# Altium PCB ProjetM1S1.PCBDOC
Units mm, origin at the board's own origin, x right, y up, seen from the top; angles counter-clockwise.
Board outline 299.72 x 199.9 mm, 2 copper layers (Top Layer, Bottom Layer); 7 components, 17 nets, 59 pads, 9 vias.
Unrouted connection lines stored in the file: 1.
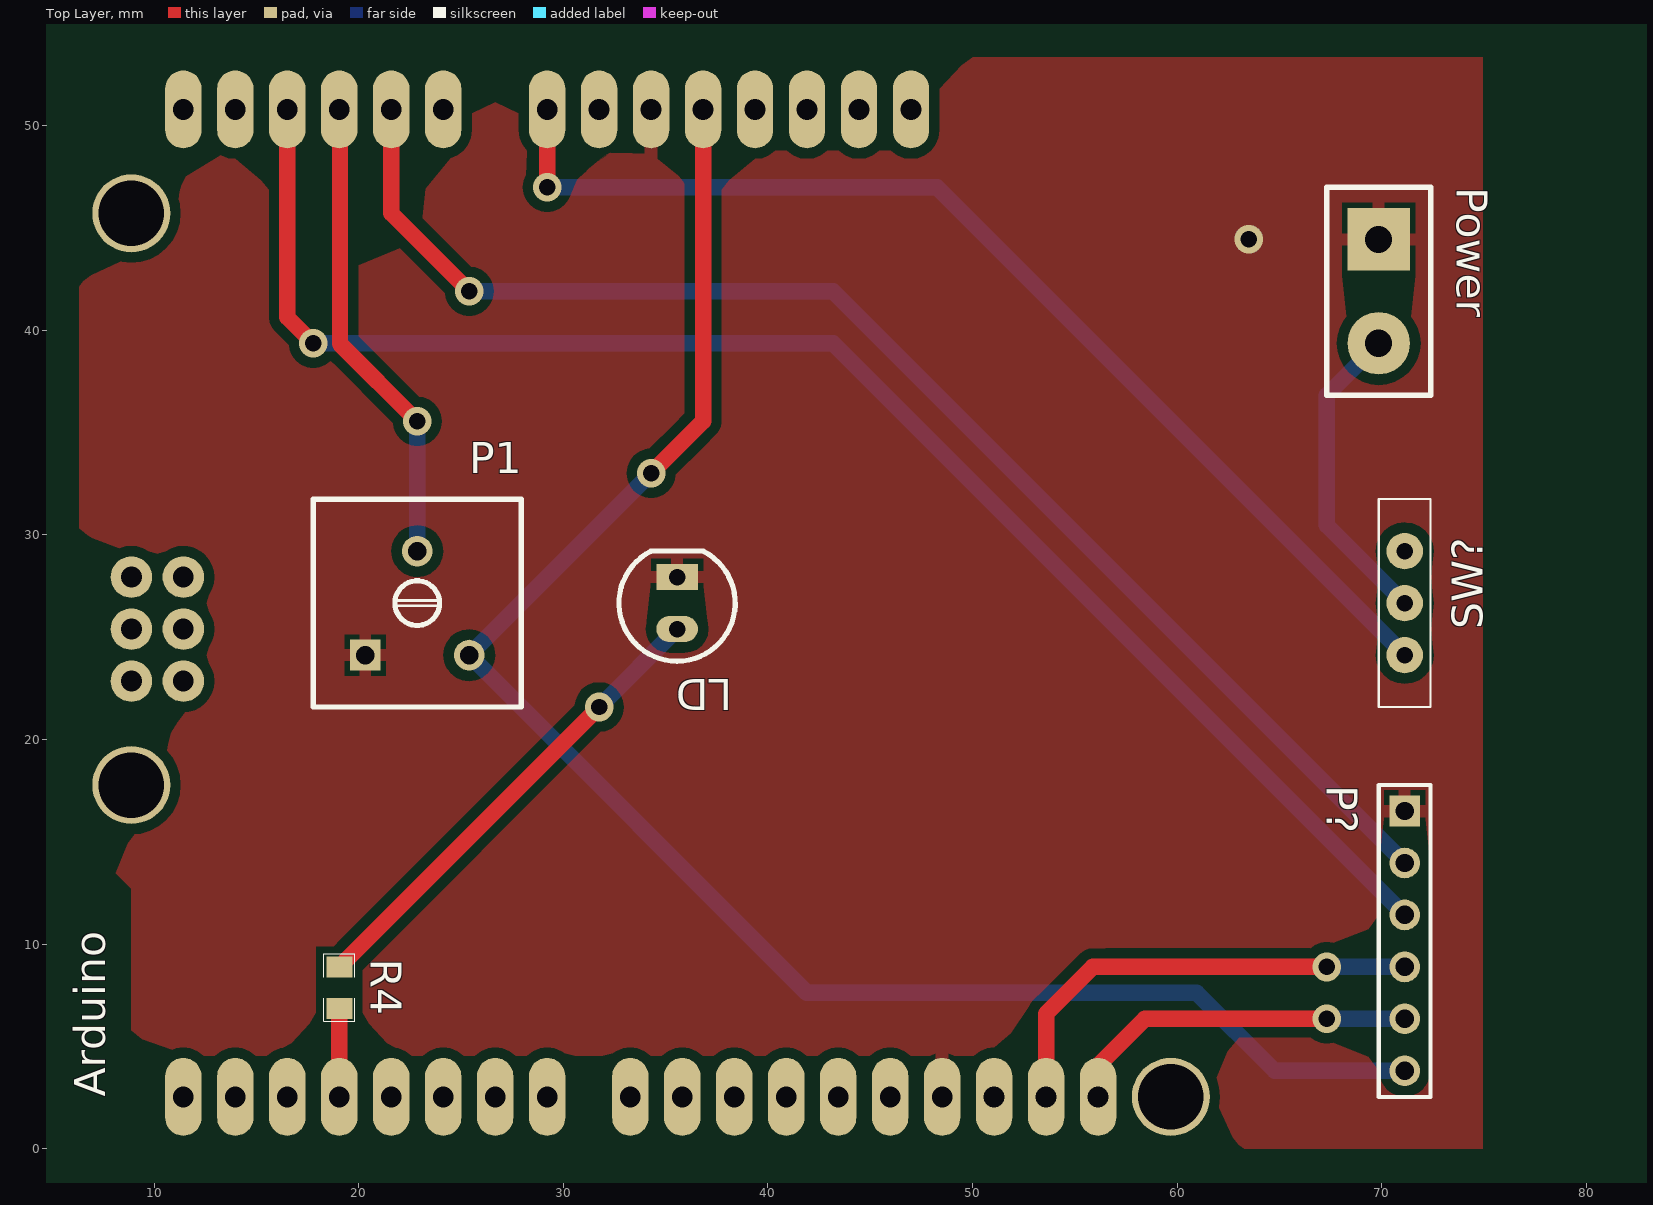
[diagram p0: Top Layer view]
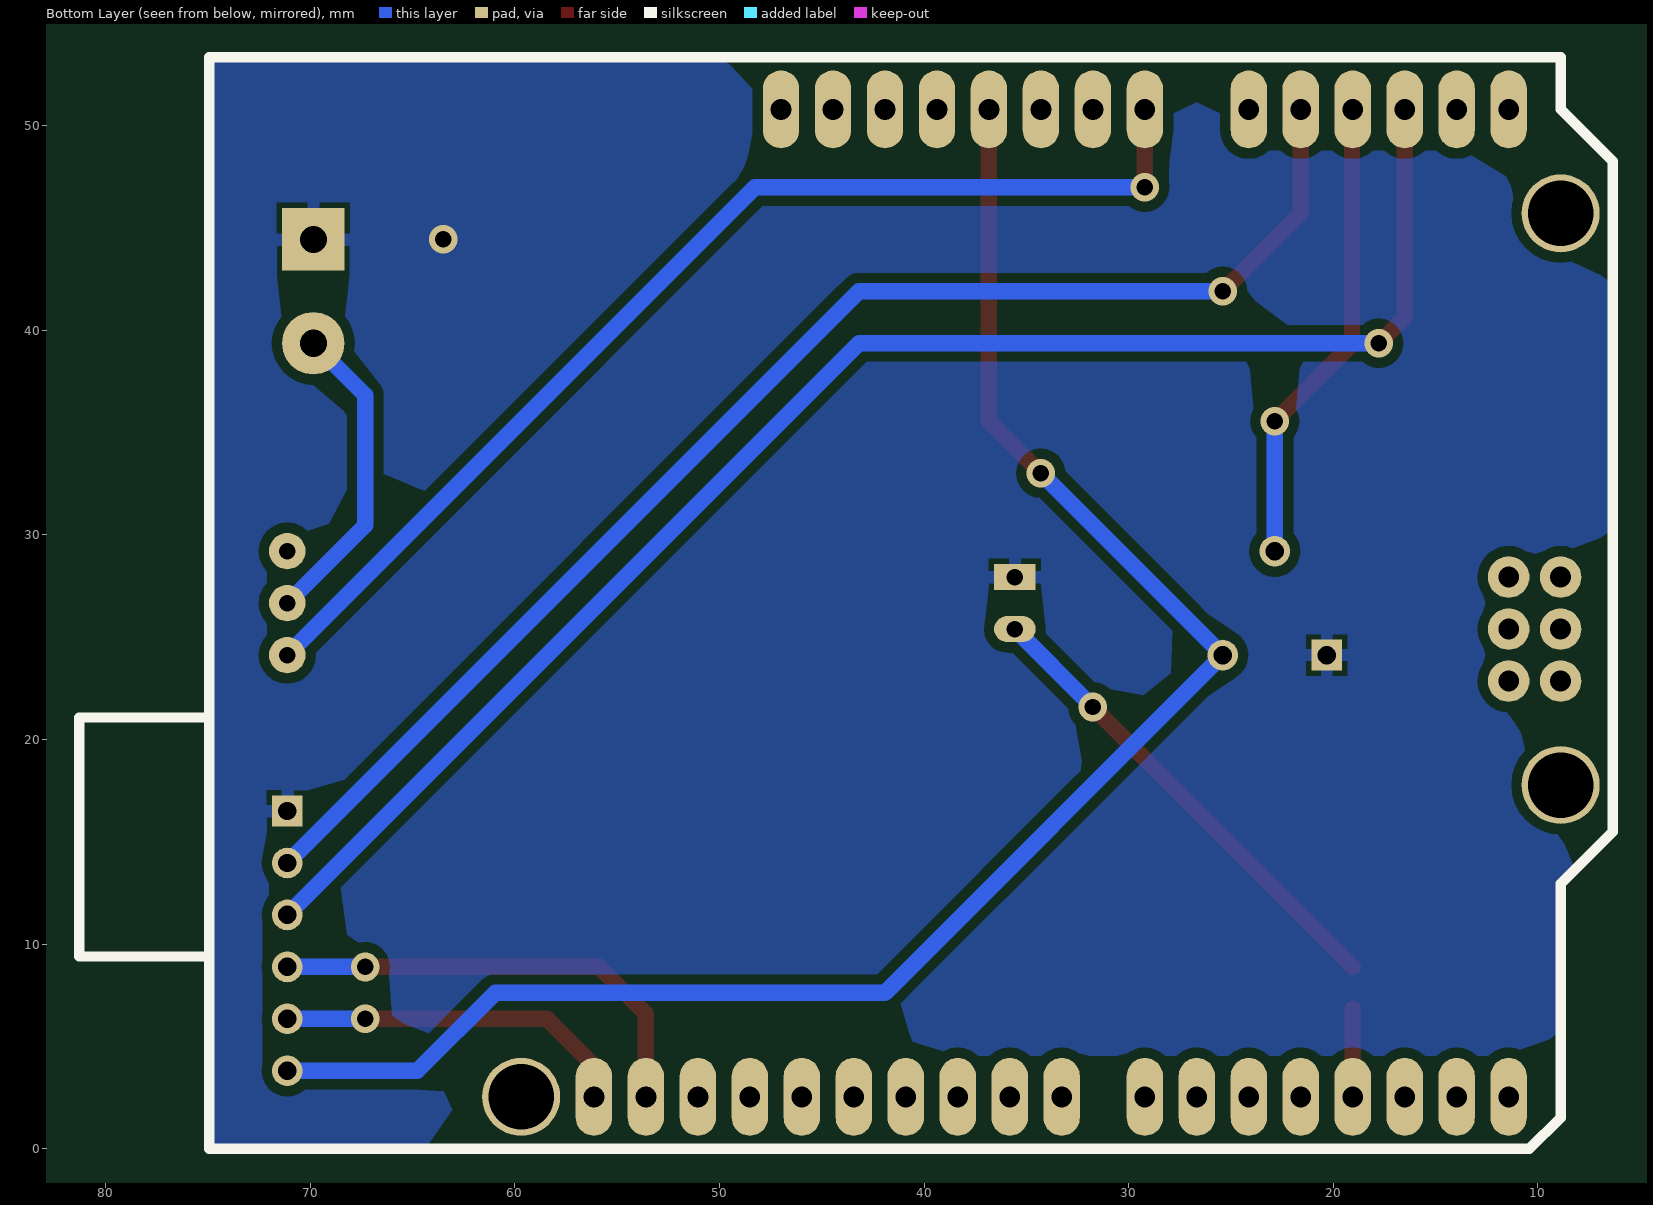
[diagram p1: Bottom Layer view, seen from below]

## Layer stack, top to bottom
Top Solder: solder mask 0.0102, Solder Resist, Dk 3.5
Top Layer: signal copper 0.0356
Dielectric1: dielectric 0.32, FR-4, Dk 4.8
Bottom Layer: signal copper 0.0356
Bottom Solder: solder mask 0.0102, Solder Resist, Dk 3.5

## Board outline
-141.655,-46.39 158.065,-46.39 158.065,153.508 -141.655,153.508

## Design rules (kind name [scope] priority, off if disabled: settings)
Clearance Clearance_bottom_polygon [OnLayer('Bottom Layer') Or OnLayer('Multi-Layer') vs OnLayer('Bottom Layer')  And  InPoly] p1: gap=0.508
Clearance Clearance_top_polygon [OnLayer('Top Layer')  Or OnLayer('Multi-Layer') vs OnLayer('Top Layer') And InPoly] p2: gap=0.508
Clearance Clearance_bottom [OnLayer('Bottom Layer') Or OnLayer('Multi-Layer') vs OnLayer('Bottom Layer')  And Not InPoly] p3: gap=0.203
Clearance Clearance_top [OnLayer('Top Layer')  Or OnLayer('Multi-Layer') vs OnLayer('Top Layer') And Not InPoly] p4: gap=0.203
Clearance Clearance_pad_to_pad [OnLayer('Multi-Layer') vs OnLayer('Multi-Layer')] p5: gap=0.254
ComponentClearance ComponentClearance_bottom [OnLayer('Bottom Overlay') vs OnLayer('Bottom Overlay')] p1: gap=0 collisioncheckmode=3 verticalgap=0.254 showdistances=FALSE
ComponentClearance ComponentClearance_top [OnLayer('Top Overlay') vs OnLayer('Top Overlay')] p2: gap=0 collisioncheckmode=3 verticalgap=0.254 showdistances=FALSE
FabricationTestPointUsage TestPointUsage [All] p1: valid=0 allowmultiple=FALSE
FabricationTestpoint Testpoint [All] p1: side=3 testpointundercomponent=TRUE minsize=1.016 maxsize=2.54 preferedsize=1.524 minholesize=0 maxholesize=1.016 preferedholesize=0.813 testpointgrid=0.025 allowsidetop=TRUE allowsidebottom=TRUE usegrid=TRUE gridtolerance=0
HoleSize [All] p1: absolutevalues=TRUE maxlimit=25.4 minlimit=0.406 maxpercent=80.000 minpercent=20.000
MinimumAnnularRing [PadXSize_AllLayers = PadYSize_AllLayers] p1: minimumring=0.254
PermittedLayers [All] p1: toplayerpermitted=TRUE bottomlayerpermitted=TRUE
PolygonConnect [All] p1: connectstyle=Relief reliefconductorwidth=0.61 reliefentries=4 polygonreliefangle="90 Angle" airgapwidth=0.254
RoutingVias [All] p1: holewidth=0.406 width=0.914 viastyle="Through Hole" minholewidth=0.406 minwidth=0.914 maxholewidth=25.4 maxwidth=25.4
SMDNeckDown [All] p1: percent=95.000
SMDToPlane [All] p1: distance=0
SolderMaskExpansion [All] p1: expansion=0.102
ViasUnderSMD [All] p1: allowed=FALSE
Width [All] p1: maxlimit=1 minlimit=0.254 preferedwidth=0.8 minimp=50.000000 maximp=50.000000 favimp=50.000000
Width Width_botom_top [OnLayer('Bottom Layer') or OnLayer('Top Layer')] p2: maxlimit=254 minlimit=0.254 preferedwidth=0.813
26 further rules are at their usual default settings.

## Components (designator, comment, footprint, x,y, rotation, side; value= is the part's Value field where it differs from the comment)
Arduino "ARDUINO_UNO" ARDUINO_UNO 74.93,53.34 r180 top
LD "" LED5 35.56,27.94 r180 top
P1 "POT_SINGLE" BOURNS3310Y 20.32,24.13 r90 top
P? "Header 6" HDR1X6 71.12,3.81 r90 top
Power "" POWER2 69.85,44.45 r270 top
R4 "RES" 0805 19.05,8.89 r270 top
SW? "SW_SPDT" 1K2_V 71.12,26.67 r180 top

## Footprints (in the part's own frame and the unit in brackets; to place one, negate y for a bottom-side part, rotate by r counter-clockwise, add the part's x,y. Pads: shape width x height; smd on the part's side, far side on the other; paste and mask are expansions set on the pad)
1K2_V [mil]
  round 70 hole 32: 1(0,0) 2(0,100) 3(0,-100)
  silkscreen extent -50,-200 50,200
0805 [mil]
  rect 40x50 smd: 1(0,0) 2(80,0)
  silkscreen extent -25,-30 105,30
ARDUINO_UNO [mil]
  oval 70x150 hole 40: 0(1200,100) 1(1300,100) 2(1400,100) 3(1500,100) 4(1600,100) 5(1700,100) 6(1800,100) 7(2000,100) 8(2100,100) 9(2200,100) 10(2300,100) 11(2400,100) 12(2500,100) 13(2500,2000) 14(2400,2000) 15(2300,2000) 16(2200,2000) 17(2100,2000) 18(2000,2000) 19(1900,2000) 20(1800,2000) 21(1640,2000) 22(1540,2000) 23(1440,2000) 24(1340,2000) 25(1240,2000) 26(1140,2000) 27(1040,2000) 28(940,2000) 29(840,2000) 30(740,2000) 100(1100,100)
  round 80 hole 40: 31(2500,1200) 32(2600,1200) 33(2500,1100) 34(2600,1100) 35(2500,1000) 36(2600,1000)
  round 150 hole 126: ""(600,2000) ""(2600,300) ""(2600,1400)
BOURNS3310Y [mm]
  rect 1.5x1.5 hole 0.9: 1(0,0)
  round 1.5 hole 0.9: 2(5.08,-2.54) 3(0,-5.08)
  silkscreen extent -2.54,-7.62 7.62,2.54
HDR1X6 [mm] "Connector; Header; 6 Position"
  round 1.5 hole 0.9: 1(0,0) 2(2.54,0) 3(5.08,0) 4(7.62,0) 5(10.16,0)
  rect 1.5x1.5 hole 0.9: 6(12.7,0)
  silkscreen extent -1.27,-1.27 13.97,1.27
LED5 [mil] "5mm LED"
  oval 80x50 hole 32 unplated: A(0,100)
  rect 80x50 hole 32 unplated: K(0,0)
  silkscreen extent -112,-50 112,162
POWER2 [mil]
  rect 120x120 hole 52: 1(0,0)
  round 120 hole 52: 2(200,0)
  silkscreen extent -100,-100 300,100

## Part data
LD: library part LED, "LED 5mm/3mm/CMS"
P1: "potentiomètre simple"
P?: "Header, 6-Pin"
Power: library part POWER2, "connecteur alim 2 pôles"
R4: "resistance"

## Via types
v1: diameter 1.4, hole 0.8, Top Layer to Bottom Layer, 9 vias

## Nets (pads, with @x,y where several pads share a name; then routed paths per layer and width w, separated by ;. In a path a pad name is that pad's centre, name@x,y a point inside that pad or via, vN(x,y) a via of type N, cw(c..) or ccw(c..) an arc to the next point about the centre after c; other vN are vias at no path point)
A1: Arduino.8 P?.5 | length 67.8
  Top Layer w0.8: Arduino.8 21.59,45.72 v1(25.4,41.91)
  Bottom Layer w0.8: v1(25.4,41.91) 26.67,41.91 43.18,41.91 P?.5
A2: Arduino.9 P1.2 | length 23.2
  Top Layer w0.8: Arduino.9 19.083,50.767 19.083,39.337 v1(22.86,35.56)
  Bottom Layer w0.8: P1.2 v1(22.86,35.56)
A3: Arduino.10 P?.4 | length 76.9
  Top Layer w0.8: Arduino.10 16.51,40.64 v1(17.78,39.37)
  Bottom Layer w0.8: v1(17.78,39.37) 43.18,39.37 P?.4
GND: Arduino.4 Arduino.5 Arduino.27 LD.K P1.1 P?.6 Power.1
  other v1: 63.5,44.45
NetArduino_6: Arduino.6 SW?.2 | length 55.2
  Top Layer w0.8: v1(29.21,46.99) Arduino.6
  Bottom Layer w0.8: v1(29.21,46.99) 48.26,46.99 SW?.2
NetLD_A: LD.A R4.1 | length 23.3
  Top Layer w0.8: R4.1 v1(31.75,21.59)
  Bottom Layer w0.8: v1(31.75,21.59) LD.A
NetPower_2: Power.2 SW?.1 | length 15.3
  Bottom Layer w0.8: Power.2 67.31,36.83 67.31,30.48 SW?.1
PIN1: Arduino.14
PIN2: Arduino.15
PIN3: Arduino.16 R4.2 | length 4.3
  Top Layer w0.8: Arduino.16 R4.2
PIN4: Arduino.17
PIN5: Arduino.18
PIN6: Arduino.19
PIN7: Arduino.20
SCL: Arduino.30 P?.2 | length 15.9
  Top Layer w0.8: Arduino.30@56.134,4.064 58.42,6.35 v1(67.31,6.35)
  Bottom Layer w0.8: v1(67.31,6.35) P?.2
SDA: Arduino.29 P?.3 | length 22.5
  Top Layer w0.8: Arduino.29 53.594,6.604 55.88,8.89 v1(67.31,8.89)
  Bottom Layer w0.8: v1(67.31,8.89) P?.3
VCC: Arduino.3 P1.3 P?.1 | length 85.5
  Top Layer w0.8: v1(34.29,33.02) 36.83,35.56 Arduino.3
  Bottom Layer w0.8: v1(34.29,33.02) P1.3 41.91,7.62 60.96,7.62 64.77,3.81 P?.1
pads on no net: Arduino. Arduino.0 Arduino.1 Arduino.2 Arduino.7 Arduino.11 Arduino.12 Arduino.13 Arduino.21 Arduino.22 Arduino.23 Arduino.24 Arduino.25 Arduino.26 Arduino.28 Arduino.31 Arduino.32 Arduino.33 Arduino.34 Arduino.35 Arduino.36 Arduino.100 SW?.3

## Polygon pours and split planes (outlines as drawn)
GND on Bottom Layer "Bot GND" (solid, pour order 5): 8.89,53.34 8.89,50.8 6.35,48.26 6.35,15.24 8.89,12.7 8.89,1.27 10.16,0 74.93,0 74.93,53.34
GND on Top Layer "Bot GND" (solid, pour order 7): 6.35,48.26 6.35,15.24 8.89,12.7 8.89,1.27 10.16,0 74.93,0 74.93,53.34 8.89,53.34 8.89,50.8

## Keep-outs
Keep-Out Layer:
  rectangle: -135.695,152.27 149.305,157.27
  rectangle: 149.305,-37.73 154.305,157.27
  rectangle: -135.695,-42.73 154.305,-37.73
  rectangle: -140.695,-42.73 -135.695,157.27

## Silkscreen, mask and mechanical layers (free items; w line width, h text height)
Top Overlay:
  text "Les bandes en violet delimitent la surface utilisable...." at -144.907,179.832 h6.35
  text "Mais vous n'etes pas obliges de tout utiliser!!" at -128.651,169.545 h6.35
Mechanical 1:
  lines w0.5: 6.35,15.24 8.89,12.7 8.89,1.27 10.16,0 74.93,0 74.93,53.34 8.89,53.34 8.89,50.8 6.35,48.26 6.35,15.24